# Altium PCB dankboard-xs-ortho.PcbDoc
Units mil, origin at the board's own origin, x right, y up, seen from the top; angles counter-clockwise.
Board outline 6000 x 4000 mil, 2 copper layers (Top Layer, Bottom Layer); 98 components, 65 nets, 466 pads, 0 vias.
Unrouted connection lines stored in the file: 150.
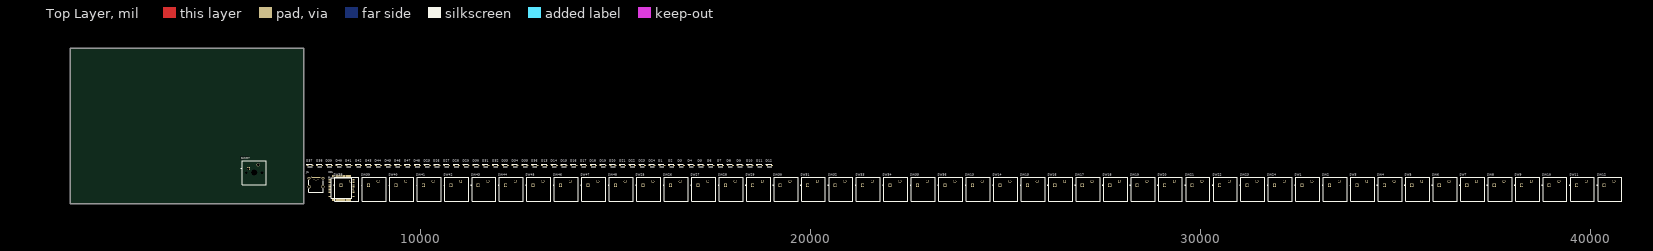
[diagram p0: Top Layer view]
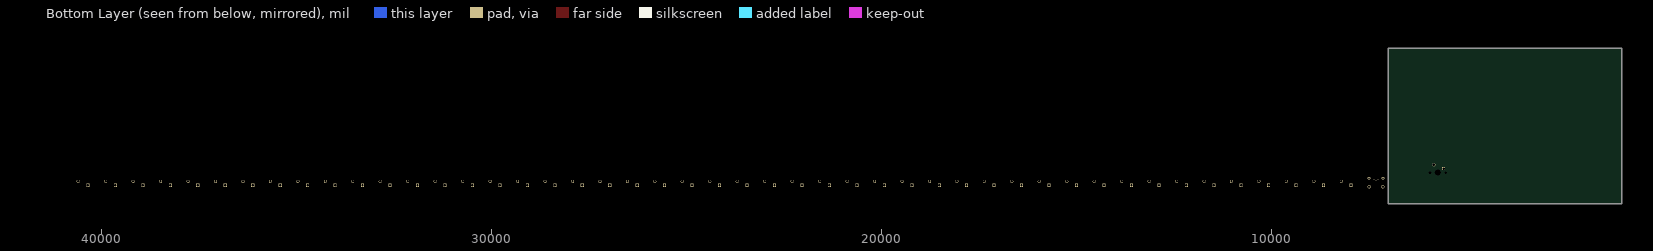
[diagram p1: Bottom Layer view, seen from below]

## Layer stack, top to bottom
Top Solder: solder mask 0.4, Solder Resist, Dk 3.5
Top Layer: signal copper 1.4
Dielectric 1: dielectric 12.6, FR-4, Dk 4.8
Bottom Layer: signal copper 1.4
Bottom Solder: solder mask 0.4, Solder Resist, Dk 3.5

## Board outline
1000,1000 7000,1000 7000,5000 1000,5000

## Design rules (kind name [scope] priority, off if disabled: settings)
Clearance [All] p1: gap=10 ignorepadtopadclearanceinfootprint=FALSE except(0: Arc-Hole Track-Hole SMDPad-Hole THPad-Hole Via-Hole Fill-Hole Poly-Hole Region-Hole Text-Hole)
PolygonConnect [All] p1: connectstyle=Relief reliefconductorwidth=10 reliefentries=4 polygonreliefangle="90 Angle" airgapwidth=10
RoomDefinition Matrix [InComponentClass('Matrix')] p1: confinementstyle=ConfineIn formatcopy=TRUE lockcomponents=FALSE outline 7045,1910 19055,1910 19055,2160 7045,2160
RoomDefinition dankboard-xs-ortho [InComponentClass('dankboard-xs-ortho')] p2: confinementstyle=ConfineIn formatcopy=TRUE lockcomponents=FALSE outline 7045,1060 8315,1060 8315,1860 7045,1860
RoutingVias [All] p1: holewidth=28 width=50 viastyle="Through Hole" minholewidth=28 minwidth=50 maxholewidth=28 maxwidth=50
SolderMaskExpansion [All] p1: expansion=4 istentingtop=FALSE
Width [All] p1: maxlimit=10 minlimit=10 preferedwidth=10
30 further rules are at their usual default settings.

## Classes and differential pairs
component class dankboard-xs-ortho: IC1 J1

## Components (designator, comment, footprint, x,y, rotation, side; value= is the part's Value field where it differs from the comment)
D1 "1N4148W-E3-08" SOD3716X135N 16185,1985 r0 top
D2 "1N4148W-E3-08" SOD3716X135N 16435,1985 r0 top
D3 "1N4148W-E3-08" SOD3716X135N 16685,1985 r0 top
D4 "1N4148W-E3-08" SOD3716X135N 16940,1985 r0 top
D5 "1N4148W-E3-08" SOD3716X135N 17190,1985 r0 top
D6 "1N4148W-E3-08" SOD3716X135N 17440,1985 r0 top
D7 "1N4148W-E3-08" SOD3716X135N 17690,1985 r0 top
D8 "1N4148W-E3-08" SOD3716X135N 17940,1985 r0 top
D9 "1N4148W-E3-08" SOD3716X135N 18190,1985 r0 top
D10 "1N4148W-E3-08" SOD3716X135N 18445,1985 r0 top
D11 "1N4148W-E3-08" SOD3716X135N 18695,1985 r0 top
D12 "1N4148W-E3-08" SOD3716X135N 18945,1985 r0 top
D13 "1N4148W-E3-08" SOD3716X135N 13175,1985 r0 top
D14 "1N4148W-E3-08" SOD3716X135N 13425,1985 r0 top
D15 "1N4148W-E3-08" SOD3716X135N 13675,1985 r0 top
D16 "1N4148W-E3-08" SOD3716X135N 13925,1985 r0 top
D17 "1N4148W-E3-08" SOD3716X135N 14180,1985 r0 top
D18 "1N4148W-E3-08" SOD3716X135N 14430,1985 r0 top
D19 "1N4148W-E3-08" SOD3716X135N 14680,1985 r0 top
D20 "1N4148W-E3-08" SOD3716X135N 14930,1985 r0 top
D21 "1N4148W-E3-08" SOD3716X135N 15180,1985 r0 top
D22 "1N4148W-E3-08" SOD3716X135N 15430,1985 r0 top
D23 "1N4148W-E3-08" SOD3716X135N 15685,1985 r0 top
D24 "1N4148W-E3-08" SOD3716X135N 15935,1985 r0 top
D25 "1N4148W-E3-08" SOD3716X135N 10165,1985 r0 top
D26 "1N4148W-E3-08" SOD3716X135N 10415,1985 r0 top
D27 "1N4148W-E3-08" SOD3716X135N 10665,1985 r0 top
D28 "1N4148W-E3-08" SOD3716X135N 10915,1985 r0 top
D29 "1N4148W-E3-08" SOD3716X135N 11165,1985 r0 top
D30 "1N4148W-E3-08" SOD3716X135N 11420,1985 r0 top
D31 "1N4148W-E3-08" SOD3716X135N 11670,1985 r0 top
D32 "1N4148W-E3-08" SOD3716X135N 11920,1985 r0 top
D33 "1N4148W-E3-08" SOD3716X135N 12170,1985 r0 top
D34 "1N4148W-E3-08" SOD3716X135N 12420,1985 r0 top
D35 "1N4148W-E3-08" SOD3716X135N 12675,1985 r0 top
D36 "1N4148W-E3-08" SOD3716X135N 12925,1985 r0 top
D37 "1N4148W-E3-08" SOD3716X135N 7155,1985 r0 top
D38 "1N4148W-E3-08" SOD3716X135N 7405,1985 r0 top
D39 "1N4148W-E3-08" SOD3716X135N 7655,1985 r0 top
D40 "1N4148W-E3-08" SOD3716X135N 7905,1985 r0 top
D41 "1N4148W-E3-08" SOD3716X135N 8155,1985 r0 top
D42 "1N4148W-E3-08" SOD3716X135N 8405,1985 r0 top
D43 "1N4148W-E3-08" SOD3716X135N 8660,1985 r0 top
D44 "1N4148W-E3-08" SOD3716X135N 8910,1985 r0 top
D45 "1N4148W-E3-08" SOD3716X135N 9160,1985 r0 top
D46 "1N4148W-E3-08" SOD3716X135N 9410,1985 r0 top
D47 "1N4148W-E3-08" SOD3716X135N 9660,1985 r0 top
D48 "1N4148W-E3-08" SOD3716X135N 9915,1985 r0 top
IC1 "STM32G473VET6" QFP50P1600X1600X160-100N 7965,1410 r0 top
J1 "UJ31-CH-G2-SMT-TR" UJ31CHG2SMTTR 7310,1440 r0 top
SW1 "MX1A-11NW" CHRY-MX1A-11NW_V 32760,1380 r0 top
SW2 "MX1A-11NW" CHRY-MX1A-11NW_V 33465,1380 r0 top
SW3 "MX1A-11NW" CHRY-MX1A-11NW_V 34165,1380 r0 top
SW4 "MX1A-11NW" CHRY-MX1A-11NW_V 34870,1380 r0 top
SW5 "MX1A-11NW" CHRY-MX1A-11NW_V 35575,1380 r0 top
SW6 "MX1A-11NW" CHRY-MX1A-11NW_V 36280,1380 r0 top
SW7 "MX1A-11NW" CHRY-MX1A-11NW_V 36985,1380 r0 top
SW8 "MX1A-11NW" CHRY-MX1A-11NW_V 37690,1380 r0 top
SW9 "MX1A-11NW" CHRY-MX1A-11NW_V 38395,1380 r0 top
SW10 "MX1A-11NW" CHRY-MX1A-11NW_V 39100,1380 r0 top
SW11 "MX1A-11NW" CHRY-MX1A-11NW_V 39805,1380 r0 top
SW12 "MX1A-11NW" CHRY-MX1A-11NW_V 40510,1380 r0 top
SW13 "MX1A-11NW" CHRY-MX1A-11NW_V 24305,1380 r0 top
SW14 "MX1A-11NW" CHRY-MX1A-11NW_V 25010,1380 r0 top
SW15 "MX1A-11NW" CHRY-MX1A-11NW_V 25715,1380 r0 top
SW16 "MX1A-11NW" CHRY-MX1A-11NW_V 26415,1380 r0 top
SW17 "MX1A-11NW" CHRY-MX1A-11NW_V 27120,1380 r0 top
SW18 "MX1A-11NW" CHRY-MX1A-11NW_V 27825,1380 r0 top
SW19 "MX1A-11NW" CHRY-MX1A-11NW_V 28530,1380 r0 top
SW20 "MX1A-11NW" CHRY-MX1A-11NW_V 29235,1380 r0 top
SW21 "MX1A-11NW" CHRY-MX1A-11NW_V 29940,1380 r0 top
SW22 "MX1A-11NW" CHRY-MX1A-11NW_V 30645,1380 r0 top
SW23 "MX1A-11NW" CHRY-MX1A-11NW_V 31350,1380 r0 top
SW24 "MX1A-11NW" CHRY-MX1A-11NW_V 32055,1380 r0 top
SW25 "MX1A-11NW" CHRY-MX1A-11NW_V 15850,1380 r0 top
SW26 "MX1A-11NW" CHRY-MX1A-11NW_V 16555,1380 r0 top
SW27 "MX1A-11NW" CHRY-MX1A-11NW_V 17260,1380 r0 top
SW28 "MX1A-11NW" CHRY-MX1A-11NW_V 17965,1380 r0 top
SW29 "MX1A-11NW" CHRY-MX1A-11NW_V 18665,1380 r0 top
SW30 "MX1A-11NW" CHRY-MX1A-11NW_V 19370,1380 r0 top
SW31 "MX1A-11NW" CHRY-MX1A-11NW_V 20075,1380 r0 top
SW32 "MX1A-11NW" CHRY-MX1A-11NW_V 20780,1380 r0 top
SW33 "MX1A-11NW" CHRY-MX1A-11NW_V 21485,1380 r0 top
SW34 "MX1A-11NW" CHRY-MX1A-11NW_V 22190,1380 r0 top
SW35 "MX1A-11NW" CHRY-MX1A-11NW_V 22895,1380 r0 top
SW36 "MX1A-11NW" CHRY-MX1A-11NW_V 23600,1380 r0 top
SW37 "MX1A-11NW" CHRY-MX1A-11NW_V 5725,1805 r0 top
SW38 "MX1A-11NW" CHRY-MX1A-11NW_V 8100,1380 r0 top
SW39 "MX1A-11NW" CHRY-MX1A-11NW_V 8805,1380 r0 top
SW40 "MX1A-11NW" CHRY-MX1A-11NW_V 9510,1380 r0 top
SW41 "MX1A-11NW" CHRY-MX1A-11NW_V 10215,1380 r0 top
SW42 "MX1A-11NW" CHRY-MX1A-11NW_V 10920,1380 r0 top
SW43 "MX1A-11NW" CHRY-MX1A-11NW_V 11620,1380 r0 top
SW44 "MX1A-11NW" CHRY-MX1A-11NW_V 12325,1380 r0 top
SW45 "MX1A-11NW" CHRY-MX1A-11NW_V 13030,1380 r0 top
SW46 "MX1A-11NW" CHRY-MX1A-11NW_V 13735,1380 r0 top
SW47 "MX1A-11NW" CHRY-MX1A-11NW_V 14440,1380 r0 top
SW48 "MX1A-11NW" CHRY-MX1A-11NW_V 15145,1380 r0 top

## Footprints (in the part's own frame and the unit in brackets; to place one, negate y for a bottom-side part, rotate by r counter-clockwise, add the part's x,y. Pads: shape width x height; smd on the part's side, far side on the other; paste and mask are expansions set on the pad)
CHRY-MX1A-11NW_V [mm] "THD, 2-Leads, Body 15.6x15.6mm"
  rect 2x2 hole 1.499 paste+0: 1(-3.81,2.54)
  round 2 hole 1.499 paste+0: 2(2.54,5.08)
  round 0 hole 3.988 unplated paste+0: MH1(0,0)
  round 0 hole 1.702 unplated paste+0: MH2(-5.08,0) MH3(5.08,0)
  silkscreen extent -8.57,-7.8 7.8,7.8, body extent -7.8,-7.8 7.8,7.8, height 15.2
QFP50P1600X1600X160-100N [mm]
  rect 1.475x0.3 smd: 1(-7.738,6) 2(-7.738,5.5) 3(-7.738,5) 4(-7.738,4.5) 5(-7.738,4) 6(-7.738,3.5) 7(-7.738,3) 8(-7.738,2.5) 9(-7.738,2) 10(-7.738,1.5) 11(-7.738,1) 12(-7.738,0.5) 13(-7.738,0) 14(-7.738,-0.5) 15(-7.738,-1) 16(-7.738,-1.5) 17(-7.738,-2) 18(-7.738,-2.5) 19(-7.738,-3) 20(-7.738,-3.5) 21(-7.738,-4) 22(-7.738,-4.5) 23(-7.738,-5) 24(-7.738,-5.5) 25(-7.738,-6) 51(7.738,-6) 52(7.738,-5.5) 53(7.738,-5) 54(7.738,-4.5) 55(7.738,-4) 56(7.738,-3.5) 57(7.738,-3) 58(7.738,-2.5) 59(7.738,-2) 60(7.738,-1.5) 61(7.738,-1) 62(7.738,-0.5) 63(7.738,0) 64(7.738,0.5) 65(7.738,1) 66(7.738,1.5) 67(7.738,2) 68(7.738,2.5) 69(7.738,3) 70(7.738,3.5) 71(7.738,4) 72(7.738,4.5) 73(7.738,5) 74(7.738,5.5) 75(7.738,6)
  rect 0.3x1.475 smd: 26(-6,-7.738) 27(-5.5,-7.738) 28(-5,-7.738) 29(-4.5,-7.738) 30(-4,-7.738) 31(-3.5,-7.738) 32(-3,-7.738) 33(-2.5,-7.738) 34(-2,-7.738) 35(-1.5,-7.738) 36(-1,-7.738) 37(-0.5,-7.738) 38(0,-7.738) 39(0.5,-7.738) 40(1,-7.738) 41(1.5,-7.738) 42(2,-7.738) 43(2.5,-7.738) 44(3,-7.738) 45(3.5,-7.738) 46(4,-7.738) 47(4.5,-7.738) 48(5,-7.738) 49(5.5,-7.738) 50(6,-7.738) 76(6,7.738) 77(5.5,7.738) 78(5,7.738) 79(4.5,7.738) 80(4,7.738) 81(3.5,7.738) 82(3,7.738) 83(2.5,7.738) 84(2,7.738) 85(1.5,7.738) 86(1,7.738) 87(0.5,7.738) 88(0,7.738) 89(-0.5,7.738) 90(-1,7.738) 91(-1.5,7.738) 92(-2,7.738) 93(-2.5,7.738) 94(-3,7.738) 95(-3.5,7.738) 96(-4,7.738) 97(-4.5,7.738) 98(-5,7.738) 99(-5.5,7.738) 100(-6,7.738)
  silkscreen extent -8.35,-6.65 6.65,6.87, body extent -8,-8 8,8, height 1.6
SOD3716X135N [mm]
  rect 1.25x0.75 smd: 1(-1.65,0) 2(1.65,0)
  silkscreen extent -2.27,-0.77 1.35,0.77, body extent -1.85,-0.77 1.85,0.77, height 1.35
UJ31CHG2SMTTR [mm]
  rect 0.35x0.7 smd: A1(-2.75,5.95) A2(-2.25,5.95) A3(-1.75,5.95) A4(-1.25,5.95) A5(-0.75,5.95) A6(-0.25,5.95) A7(0.25,5.95) A8(0.75,5.95) A9(1.25,5.95) A10(1.75,5.95) A11(2.25,5.95) A12(2.75,5.95)
  round 0.65 hole 0.4: B1(3.05,4.8) B2(2.4,4.1) B3(1.6,4.1) B4(1.2,4.8) B5(0.8,4.1) B6(0.4,4.8) B7(-0.4,4.8) B8(-0.8,4.1) B9(-1.2,4.8) B10(-1.6,4.1) B11(-2.4,4.1) B12(-3.05,4.8)
  round 0.575 hole 1.15 unplated: MH5(3.725,4.1)
  round 0.325 hole 0.65 unplated: MH6(-3.725,4.1)
  round 1.815 hole 1.22: S1(-4.5,5.6) S4(4.5,5.6)
  round 2.085 hole 1.393: S2(-4.5,0) S3(4.5,0)
  silkscreen extent -4.82,-3.65 4.82,6.85, body extent -5.09,-3.65 5.1,6.35, height 4.76

## Part data
D1 D2 D3 D4 D5 D6 D7 D8 D9 D10 D11 D12 D13 D14 D15 D16 D17 D18 D19 D20 D21 D22 D23 D24 D25 D26 D27 D28 D29 D30 D31 D32 D33 D34 D35 D36 D37 D38 D39 D40 D41 D42 D43 D44 D45 D46 D47 D48: "Diode", Manufacturer_Name=Vishay, Mouser Part Number=78-1N4148W-E3-08, Arrow Part Number=1N4148W-E3-08, Arrow Price/Stock=https://www.arrow.com/en/products/1n4148w-e3-08/vishay, Datasheet Link=http://www.vishay.com/docs/85748/1n4148w.pdf, Height=1.35mm, Manufacturer_Part_Number=1N4148W-E3-08, Mouser Price/Stock=https://www.mouser.co.uk/ProductDetail/Vishay-Semiconductors/1N4148W-E3-08?qs=bTzheeSci6TVjpxfjjRVMw%3D%3D
IC1: "Integrated Circuit", Manufacturer_Name=STMicroelectronics, Mouser Part Number=511-STM32G473VET6, Datasheet Link=https://www.st.com/resource/en/datasheet/stm32g473cb.pdf, Height=1.6mm, Manufacturer_Part_Number=STM32G473VET6, Mouser Price/Stock=https://www.mouser.co.uk/ProductDetail/STMicroelectronics/STM32G473VET6?qs=PzGy0jfpSMuOfCPr1WW9ZQ%3D%3D
J1: "Connector", Manufacturer_Name="CUI Devices", Mouser Part Number=490-UJ31-CH-G2SMT-TR, Arrow Part Number=UJ31-CH-G2-SMT-TR, Arrow Price/Stock=https://www.arrow.com/en/products/uj31-ch-g2-smt-tr/cui-devices, Datasheet Link=https://www.arrow.com/en/products/uj31-ch-g2-smt-tr/cui-devices, Height=4.66mm, Manufacturer_Part_Number=UJ31-CH-G2-SMT-TR, Mouser Price/Stock=https://www.mouser.co.uk/ProductDetail/CUI-Devices/UJ31-CH-G2-SMT-TR?qs=W0yvOO0ixfGEsh2EYrPgIQ%3D%3D
SW1 SW2 SW3 SW4 SW5 SW6 SW7 SW8 SW9 SW10 SW11 SW12 SW13 SW14 SW15 SW16 SW17 SW18 SW19 SW20 SW21 SW22 SW23 SW24 SW25 SW26 SW27 SW28 SW29 SW30 SW31 SW32 SW33 SW34 SW35 SW36 SW37 SW38 SW39 SW40 SW41 SW42 SW43 SW44 SW45 SW46 SW47 SW48: library part CMP-2000-06786-1, "Keylock Switch, 12 V, -10 to 70 degC, 2-Pin THD, RoHS, Bulk", Actuator Color=N/A, Illumination Color=N/R, Manufacturer=Cherry, Maximum AC Voltage Rating=12V, Maximum Contact Resistance=200mOhm, Maximum Current Rating=0.01A, Minimum Insulation Resistance=100MOhm, Operating Force=0.58N, Operating Temperature=-10to70C, Package Description="2-Pin Through Hole Device, Body 15.6 x 15.6 mm", Part No=MX1A11NW, Actuator Length=3.6mm, Actuator Material=N/A, Actuator Style=Button, Body Orientation=Straight, Contact Material=Silver/Gold, Contact Plating=N/A, COO=UK, Datasheet URL=https://cdn.sparkfun.com/datasheets/Components/Switches/MX%20Series.pdf, Datasheet Version=09/2000, Dielectric Strength=N/A, Dimension=15.6x15.6x15.2mm, ECCN=EAR99, Electrical Life=50000000Cycle, Family=MX, Housing Material=N/A, HTS=8536509065, Illumination Type=N/R, IP Rating=N/A, Manufacturer URL=http://cherryswitches.com/cn/, Maximum DC Voltage Rating=12V, Maximum Power Rating=N/A, Mechanical Life=N/A, Mounting=ThroughHole, Mounting Technology=ThroughHole, Number of Terminals=2, Operating Speed=N/A, Package Reference=MX1A-11NW, Packaging=N/A, Pole Throw Configuration=SPST, RoHS=Unknown, Row Spacing=6.35mm, Supplier=CherryElectrical, Switch Configuration=N.O., Terminal Pitch=2.54mm, Terminal Type=PCPins, Total Travel=4.06mm, Type=DesktopProfile

## Nets (pads, with @x,y where several pads share a name; then routed paths per layer and width w, separated by ;. In a path a pad name is that pad's centre, name@x,y a point inside that pad or via, vN(x,y) a via of type N, cw(c..) or ccw(c..) an arc to the next point about the centre after c; other vN are vias at no path point)
Column0: SW1.2 SW13.2 SW25.2 SW37.2
Column1: SW2.2 SW14.2 SW26.2 SW38.2
Column2: SW3.2 SW15.2 SW27.2 SW39.2
Column3: SW4.2 SW16.2 SW28.2 SW40.2
Column4: SW5.2 SW17.2 SW29.2 SW41.2
Column5: SW6.2 SW18.2 SW30.2 SW42.2
Column6: SW7.2 SW19.2 SW31.2 SW43.2
Column7: SW8.2 SW20.2 SW32.2 SW44.2
Column8: SW9.2 SW21.2 SW33.2 SW45.2
Column9: SW10.2 SW22.2 SW34.2 SW46.2
Column10: SW11.2 SW23.2 SW35.2 SW47.2
Column11: D1.1 D2.1 D3.1 D4.1 D5.1 D6.1 D7.1 D8.1 D9.1 D10.1 D11.1 D12.1 D13.1 D14.1 D15.1 D16.1 D17.1 D18.1 D19.1 D20.1 D21.1 D22.1 D23.1 D24.1 D25.1 D26.1 D27.1 D28.1 D29.1 D30.1 D31.1 D32.1 D33.1 D34.1 D35.1 D36.1 D37.1 D38.1 D39.1 D40.1 D41.1 D42.1 D43.1 D44.1 D45.1 D46.1 D47.1 D48.1 SW12.2 SW24.2 SW36.2 SW48.2
GND: IC1.23 IC1.35 IC1.48 IC1.63 IC1.74 J1.A1 J1.A12 J1.B1 J1.B12 J1.S1 J1.S2 J1.S3 J1.S4
NetD1_2: D1.2 SW1.1
NetD2_2: D2.2 SW2.1
NetD3_2: D3.2 SW3.1
NetD4_2: D4.2 SW4.1
NetD5_2: D5.2 SW5.1
NetD6_2: D6.2 SW6.1
NetD7_2: D7.2 SW7.1
NetD8_2: D8.2 SW8.1
NetD9_2: D9.2 SW9.1
NetD10_2: D10.2 SW10.1
NetD11_2: D11.2 SW11.1
NetD12_2: D12.2 SW12.1
NetD13_2: D13.2 SW13.1
NetD14_2: D14.2 SW14.1
NetD15_2: D15.2 SW15.1
NetD16_2: D16.2 SW16.1
NetD17_2: D17.2 SW17.1
NetD18_2: D18.2 SW18.1
NetD19_2: D19.2 SW19.1
NetD20_2: D20.2 SW20.1
NetD21_2: D21.2 SW21.1
NetD22_2: D22.2 SW22.1
NetD23_2: D23.2 SW23.1
NetD24_2: D24.2 SW24.1
NetD25_2: D25.2 SW25.1
NetD26_2: D26.2 SW26.1
NetD27_2: D27.2 SW27.1
NetD28_2: D28.2 SW28.1
NetD29_2: D29.2 SW29.1
NetD30_2: D30.2 SW30.1
NetD31_2: D31.2 SW31.1
NetD32_2: D32.2 SW32.1
NetD33_2: D33.2 SW33.1
NetD34_2: D34.2 SW34.1
NetD35_2: D35.2 SW35.1
NetD36_2: D36.2 SW36.1
NetD37_2: D37.2 SW37.1
NetD38_2: D38.2 SW38.1
NetD39_2: D39.2 SW39.1
NetD40_2: D40.2 SW40.1
NetD41_2: D41.2 SW41.1
NetD42_2: D42.2 SW42.1
NetD43_2: D43.2 SW43.1
NetD44_2: D44.2 SW44.1
NetD45_2: D45.2 SW45.1
NetD46_2: D46.2 SW46.1
NetD47_2: D47.2 SW47.1
NetD48_2: D48.2 SW48.1
USB_DM: IC1.72 J1.A7 J1.B7
USB_DP: IC1.73 J1.A6 J1.B6
USB_PD1_CC1: IC1.93 J1.A5
USB_PD2_CC2: IC1.91 J1.B5
pads on no net: IC1.1 IC1.2 IC1.3 IC1.4 IC1.5 IC1.6 IC1.7 IC1.8 IC1.9 IC1.10 IC1.11 IC1.12 IC1.13 IC1.14 IC1.15 IC1.16 IC1.17 IC1.18 IC1.19 IC1.20 IC1.21 IC1.22 IC1.24 IC1.25 IC1.26 IC1.27 IC1.28 IC1.29 IC1.30 IC1.31 IC1.32 IC1.33 IC1.34 IC1.36 IC1.37 IC1.38 IC1.39 IC1.40 IC1.41 IC1.42 IC1.43 IC1.44 IC1.45 IC1.46 IC1.47 IC1.49 IC1.50 IC1.51 IC1.52 IC1.53 IC1.54 IC1.55 IC1.56 IC1.57 IC1.58 IC1.59 IC1.60 IC1.61 IC1.62 IC1.64 IC1.65 IC1.66 IC1.67 IC1.68 IC1.69 IC1.70 IC1.71 IC1.75 IC1.76 IC1.77 IC1.78 IC1.79 IC1.80 IC1.81 IC1.82 IC1.83 IC1.84 IC1.85 IC1.86 IC1.87 IC1.88 IC1.89 IC1.90 IC1.92 IC1.94 IC1.95 IC1.96 IC1.97 IC1.98 IC1.99 IC1.100 J1.A2 J1.A3 J1.A4 J1.A8 J1.A9 J1.A10 J1.A11 J1.B2 J1.B3 J1.B4 J1.B8 J1.B9 J1.B10 J1.B11 J1.MH5 J1.MH6 SW1.MH1 SW1.MH2 SW1.MH3 SW2.MH1 SW2.MH2 SW2.MH3 SW3.MH1 SW3.MH2 SW3.MH3 SW4.MH1 SW4.MH2 SW4.MH3 SW5.MH1 SW5.MH2 SW5.MH3 SW6.MH1 SW6.MH2 SW6.MH3 SW7.MH1 SW7.MH2 SW7.MH3 SW8.MH1 SW8.MH2 SW8.MH3 SW9.MH1 SW9.MH2 SW9.MH3 SW10.MH1 SW10.MH2 SW10.MH3 SW11.MH1 SW11.MH2 SW11.MH3 SW12.MH1 SW12.MH2 SW12.MH3 SW13.MH1 SW13.MH2 SW13.MH3 SW14.MH1 SW14.MH2 SW14.MH3 SW15.MH1 SW15.MH2 SW15.MH3 SW16.MH1 SW16.MH2 SW16.MH3 SW17.MH1 SW17.MH2 SW17.MH3 SW18.MH1 SW18.MH2 SW18.MH3 SW19.MH1 SW19.MH2 SW19.MH3 SW20.MH1 SW20.MH2 SW20.MH3 SW21.MH1 SW21.MH2 SW21.MH3 SW22.MH1 SW22.MH2 SW22.MH3 SW23.MH1 SW23.MH2 SW23.MH3 SW24.MH1 SW24.MH2 SW24.MH3 SW25.MH1 SW25.MH2 SW25.MH3 SW26.MH1 SW26.MH2 SW26.MH3 SW27.MH1 SW27.MH2 SW27.MH3 SW28.MH1 SW28.MH2 SW28.MH3 SW29.MH1 SW29.MH2 SW29.MH3 SW30.MH1 SW30.MH2 SW30.MH3 SW31.MH1 SW31.MH2 SW31.MH3 SW32.MH1 SW32.MH2 SW32.MH3 SW33.MH1 SW33.MH2 SW33.MH3 SW34.MH1 SW34.MH2 SW34.MH3 SW35.MH1 SW35.MH2 SW35.MH3 SW36.MH1 SW36.MH2 SW36.MH3 SW37.MH1 SW37.MH2 SW37.MH3 SW38.MH1 SW38.MH2 SW38.MH3 SW39.MH1 SW39.MH2 SW39.MH3 SW40.MH1 SW40.MH2 SW40.MH3 SW41.MH1 SW41.MH2 SW41.MH3 SW42.MH1 SW42.MH2 SW42.MH3 SW43.MH1 SW43.MH2 SW43.MH3 SW44.MH1 SW44.MH2 SW44.MH3 SW45.MH1 SW45.MH2 SW45.MH3 SW46.MH1 SW46.MH2 SW46.MH3 SW47.MH1 SW47.MH2 SW47.MH3 SW48.MH1 SW48.MH2 SW48.MH3